# Altium PCB ArduinoUnoShield.PcbDoc
Units mil, origin at the board's own origin, x right, y up, seen from the top; angles counter-clockwise.
Board outline 2700 x 2100 mil, 2 copper layers (Top Layer, Bottom Layer); 38 components, 50 nets, 116 pads, 69 vias.
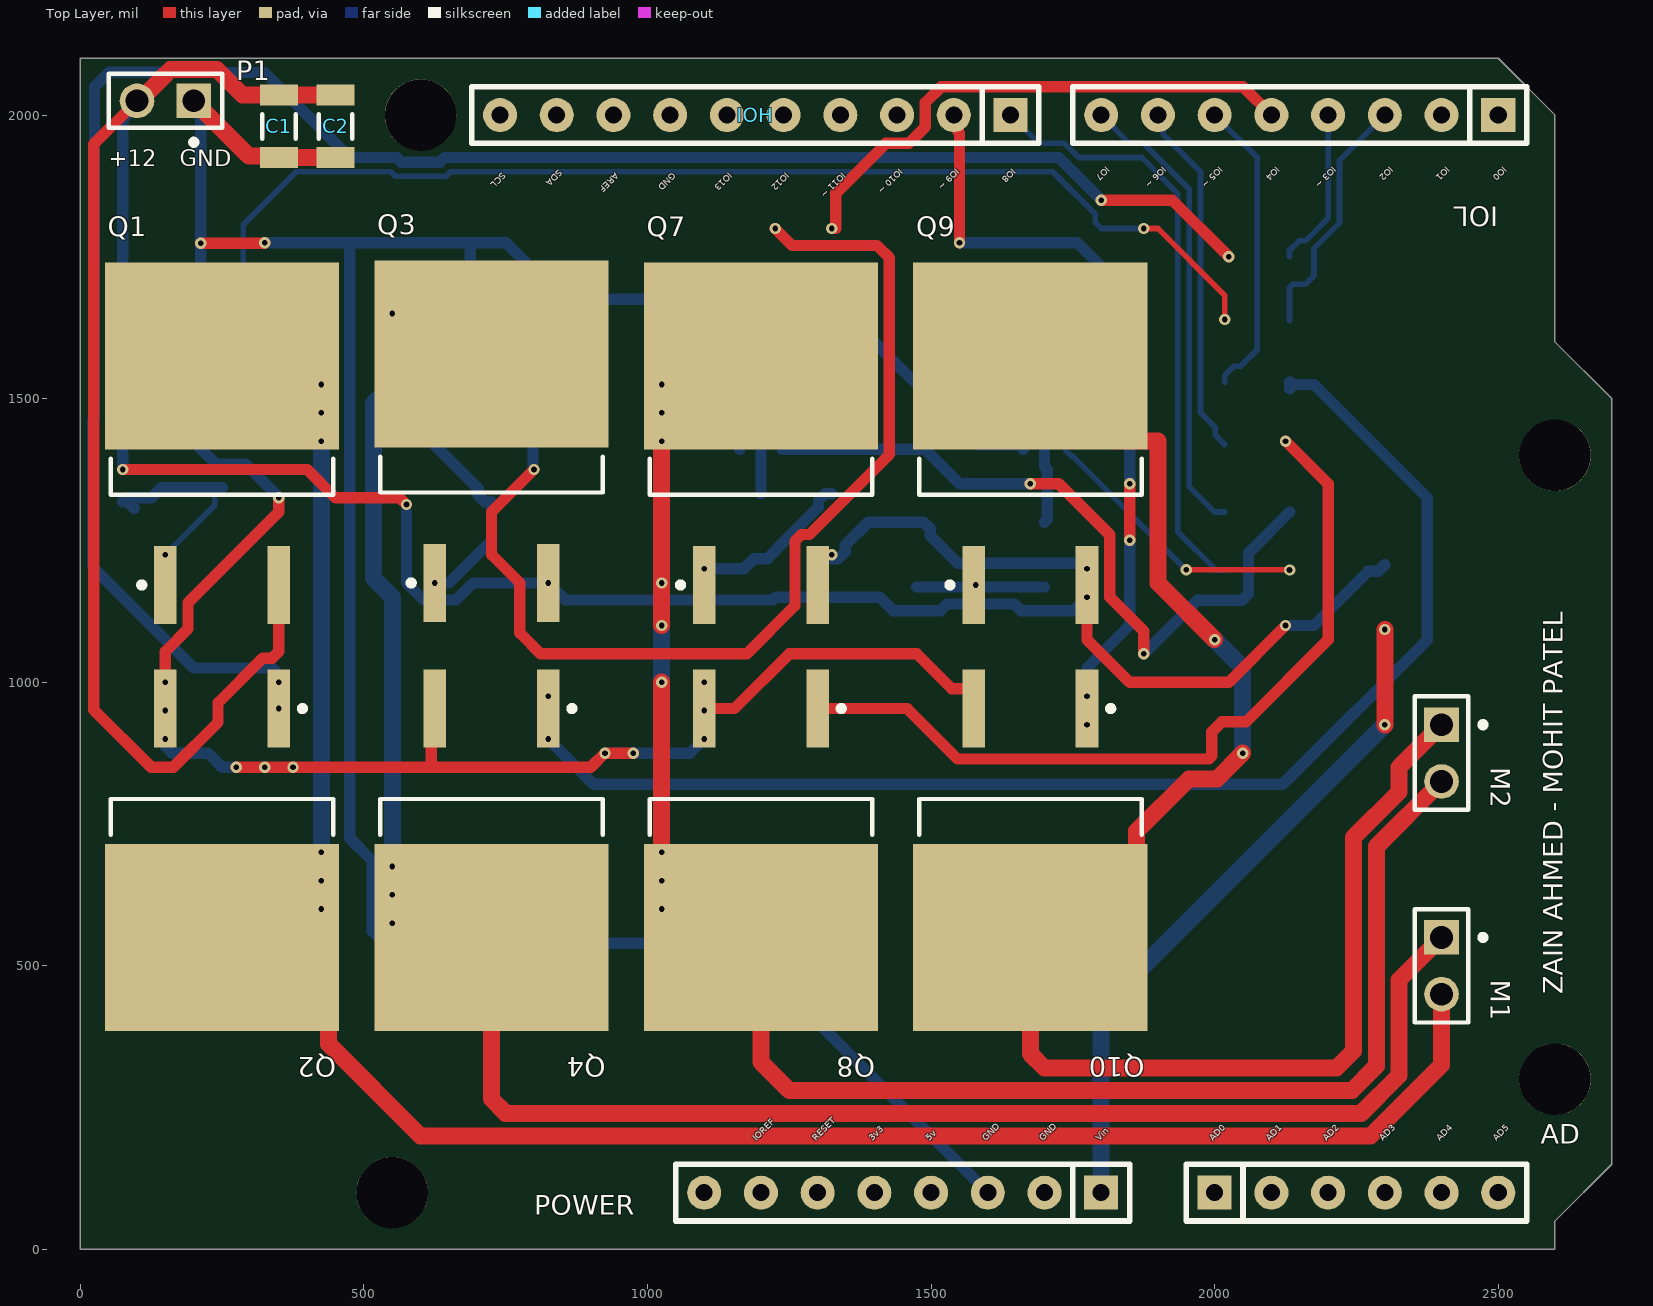
[diagram p0: Top Layer view]
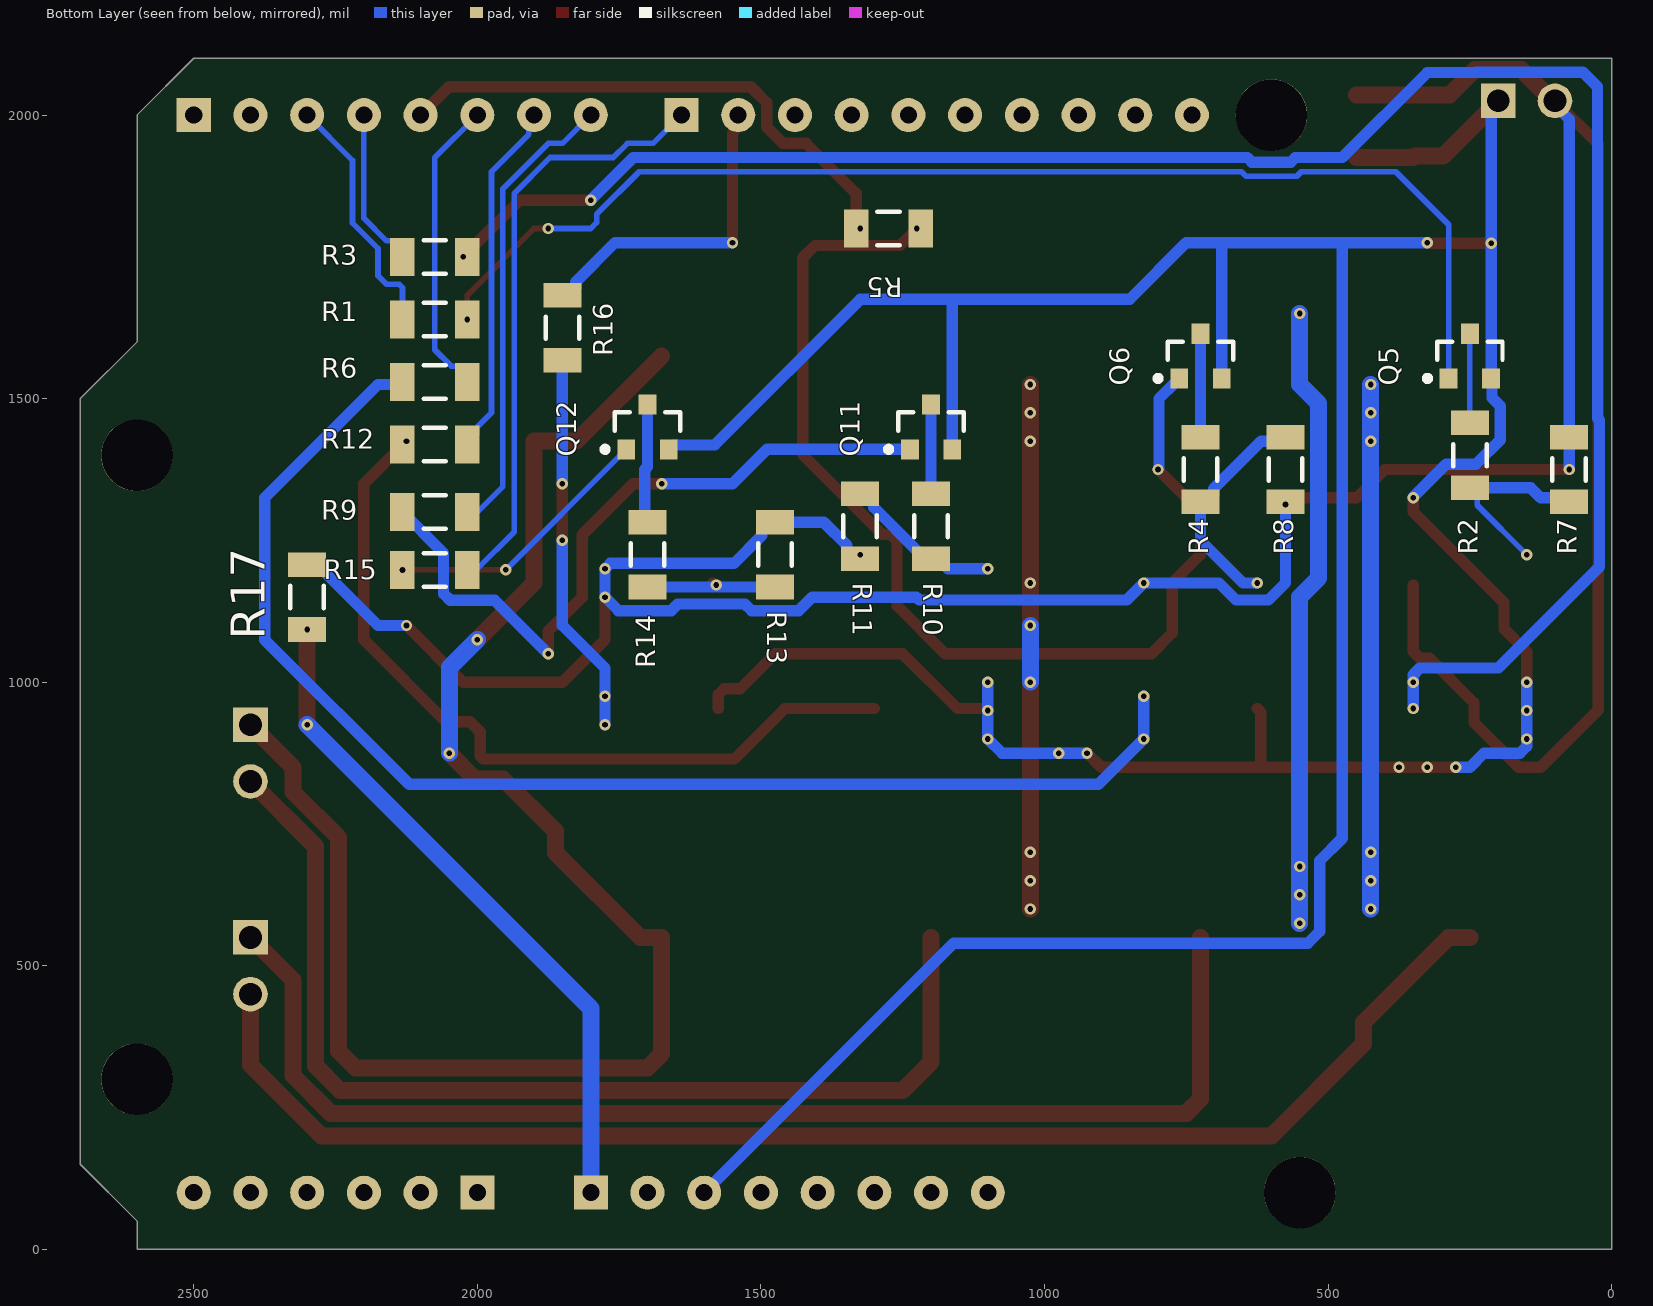
[diagram p1: Bottom Layer view, seen from below]

## Layer stack, top to bottom
Top Solder: solder mask 0.4, Solder Resist, Dk 3.5
Top Layer: signal copper 1.4
Dielectric1: dielectric 12.6, FR-4, Dk 4.8
Bottom Layer: signal copper 1.4
Bottom Solder: solder mask 0.4, Solder Resist, Dk 3.5

## Board outline
0,0 0,2100 2500,2100 2600,2000 2600,1600 2700,1500 2700,150 2600,50 2600,0

## Design rules (kind name [scope] priority, off if disabled: settings)
Clearance [All] p1: gap=10 ignorepadtopadclearanceinfootprint=FALSE except(0: Arc-Hole Track-Hole SMDPad-Hole THPad-Hole Via-Hole Fill-Hole Poly-Hole Region-Hole Text-Hole)
PolygonConnect [All] p1: connectstyle=Relief reliefconductorwidth=10 reliefentries=4 polygonreliefangle="90 Angle" airgapwidth=10
RoutingVias [All] p1: holewidth=10 width=50 viastyle="Through Hole" minholewidth=10 minwidth=20 maxholewidth=100 maxwidth=100
SilkToSolderMaskClearance SilkscreenOverComponentPads [IsPad] p1: minsilkscreentomaskgap=10 clearancetoexposedcopper=TRUE
SolderMaskExpansion [All] p1: expansion=4 istentingtop=FALSE
Width [All] p1: maxlimit=200 minlimit=10 preferedwidth=10 minimp=50.000000 maximp=50.000000 favimp=50.000000
29 further rules are at their usual default settings.

## Components (designator, comment, footprint, x,y, rotation, side; value= is the part's Value field where it differs from the comment)
AD "AD" "Header 6x1 8.5mm" 2000,100 r0 top locked
C1 "CAP 100nF 50V 1206(3216)" CAPC1206(3216)100_L 350,1980.12 r270 top value=100nF
C2 "CAP 100nF 50V 1206(3216)" CAPC1206(3216)100_L 450,1980.12 r270 top value=100nF
IOH "IOH" "Header 10x1 8.5mm" 1640,2000 r180 top locked
IOL "IOL" "Header 8x1 8.5mm" 2500,2000 r180 top locked
M1 "68000-102HLF" AMPH-68000-102HLF_V 2400,500 r270 top
M2 "68000-102HLF" AMPH-68000-102HLF_V 2400,875 r270 top
P1 "68000-102HLF" AMPH-68000-102HLF_V 150,2025 r180 top
POWER "POWER_UNO" "Header 8x1 8.5mm" 1800,100 r180 top locked
Q1 "IRF9630STRLPBF‎" ONSC-D2PAK-3-418B-04_V 250,1421.46 r90 top
Q2 "IRF630NSTRLPBF‎" ONSC-D2PAK-3-418B-04_V 250,703.54 r270 top
Q3 "IRF9630STRLPBF‎" ONSC-D2PAK-3-418B-04_V 725,1425 r90 top
Q4 "IRF630NSTRLPBF‎" ONSC-D2PAK-3-418B-04_V 725,703.54 r270 top
Q5 "BC817-16LT1G" ONSC-SOT-23-3-318-08_V 250,1575 r90 bottom
Q6 "BC817-16LT1G" ONSC-SOT-23-3-318-08_V 725,1575 r90 bottom
Q7 "IRF9630STRLPBF‎" ONSC-D2PAK-3-418B-04_V 1200,1421.46 r90 top
Q8 "IRF630NSTRLPBF‎" ONSC-D2PAK-3-418B-04_V 1200,703.54 r270 top
Q9 "IRF9630STRLPBF‎" ONSC-D2PAK-3-418B-04_V 1675,1421.46 r90 top
Q10 "IRF630NSTRLPBF‎" ONSC-D2PAK-3-418B-04_V 1675,703.54 r270 top
Q11 "BC817-16LT1G" ONSC-SOT-23-3-318-08_V 1200,1450 r90 bottom
Q12 "BC817-16LT1G" ONSC-SOT-23-3-318-08_V 1700,1450 r90 bottom
R1 "CRCW1206220KFKEA" RESC3216X60X45NL10T20 2075,1639.58 r180 bottom
R2 "CRCW1206220KFKEA" RESC3216X60X45NL10T20 250,1400 r270 bottom
R3 "CRCW1206220KFKEA" RESC3216X60X45NL10T20 2075,1750 r180 bottom
R4 "CRCW1206220KFKEA" RESC3216X60X45NL10T20 725,1375 r90 bottom
R5 "CRCW1206220KFKEA" RESC3216X60X45NL10T20 1275,1800 r0 bottom
R6 "CRCW1206220KFKEA" RESC3216X60X45NL10T20 2075,1529.17 r180 bottom
R7 "CRCW1206220KFKEA" RESC3216X60X45NL10T20 75,1375 r90 bottom
R8 "CRCW1206220KFKEA" RESC3216X60X45NL10T20 575,1375 r90 bottom
R9 "CRCW1206220KFKEA" RESC3216X60X45NL10T20 2075,1300 r0 bottom
R10 "CRCW1206220KFKEA" RESC3216X60X45NL10T20 1200,1275 r270 bottom
R11 "CRCW1206220KFKEA" RESC3216X60X45NL10T20 1325,1275 r270 bottom
R12 "CRCW1206220KFKEA" RESC3216X60X45NL10T20 2075,1418.75 r0 bottom
R13 "CRCW1206220KFKEA" RESC3216X60X45NL10T20 1475,1225 r270 bottom
R14 "CRCW1206220KFKEA" RESC3216X60X45NL10T20 1700,1225 r90 bottom
R15 "CRCW1206220KFKEA" RESC3216X60X45NL10T20 2075,1197.92 r180 bottom
R16 "CRCW1206220KFKEA" RESC3216X60X45NL10T20 1850,1625 r90 bottom
R17 "CRCW1206220KFKEA" RESC3216X60X45NL10T20 2300,1150 r270 bottom

## Footprints (in the part's own frame and the unit in brackets; to place one, negate y for a bottom-side part, rotate by r counter-clockwise, add the part's x,y. Pads: shape width x height; smd on the part's side, far side on the other; paste and mask are expansions set on the pad)
AMPH-68000-102HLF_V [mm] "THD, 2-Leads, Body 5.08x2.41mm, Pitch 2.54mm"
  rect 1.55x1.55 hole 1.02: 1(-1.27,0)
  round 1.55 hole 1.02: 2(1.27,0)
  silkscreen extent -2.54,-1.2 2.54,1.98, body extent -2.54,-1.2 2.54,1.2, height 8.38
CAPC1206(3216)100_L [mm] "Chip Capacitor, Body 3.2x1.6mm, Height 1mm, IPC High Density"
  rect 0.95x1.7 smd: 1(-1.4,0) 2(1.4,0)
  silkscreen extent -0.55,-0.75 0.55,0.75, body extent -1.7,-0.9 1.7,0.9, height 1
"Header 6x1 8.5mm" [mil] "Stackable 6 pin header"
  rect 60x60 hole 30: 1(0,0)
  round 60 hole 30: 2(100,0) 3(200,0) 4(300,0) 5(400,0) 6(500,0)
  silkscreen extent -50,-50 550,50, body extent -50,-50 550,50, height 335
"Header 8x1 8.5mm" [mil] "Stackable 8 pin header"
  rect 60x60 hole 30: 1(0,0)
  round 60 hole 30: 2(100,0) 3(200,0) 4(300,0) 5(400,0) 6(500,0) 7(600,0) 8(700,0)
  silkscreen extent -50,-50 750,50, body extent -50,-50 750,50, height 335
"Header 10x1 8.5mm" [mil] "Stackable 10 pin header"
  rect 60x60 hole 30: 1(0,0)
  round 60 hole 30: 2(100,0) 3(200,0) 4(300,0) 5(400,0) 6(500,0) 7(600,0) 8(700,0) 9(800,0) 10(900,0)
  silkscreen extent -50,-50 950,50, body extent -50,-50 950,50, height 335
ONSC-D2PAK-3-418B-04_V [mm] "DPAK, 3-Leads, Body 9.97x9.145mm, Pitch 2.54mm"
  rect 3.504x1.016 smd: 1(-6.35,2.54) 3(-6.35,-2.54)
  rect 8.38x10.49 smd: 4(3.9,0)
  silkscreen extent -6.47,-4.98 -0.69,4.98, body extent -2.3,-4.98 6.85,4.98, height 4.83
ONSC-SOT-23-3-318-08_V [mm] "SOT23, 3-Leads, Body 2.92x1.3mm, Pitch 0.95mm"
  rect 0.9x0.8 smd: 1(-1,0.95) 2(-1,-0.95) 3(1,0)
  silkscreen extent -1.12,-1.46 0.65,2.03, body extent -0.65,-1.46 0.65,1.46, height 1.11
RESC3216X60X45NL10T20 [mm] "Chip Resistor, 2-Leads, Body 3.20x1.60mm, IPC Medium Density"
  rect 1.1x1.7 smd: 1(-1.45,0) 2(1.45,0)
  silkscreen extent -0.5,-0.75 0.5,0.75, body extent -1.65,-0.85 1.65,0.85, height 0.6

## Part data
AD: Supplier Part Number 1=2699089, Supplier 1=Arrow, Supplier 2=Digi-Key, Supplier 3=Arrow, Supplier 4=Arrow, Supplier Part Number 2=SAM1198-06-ND, Supplier Part Number 3=2699088, Supplier Part Number 4=2699075
C1 C2: library part CMP-1037-04202-1, "CAP 100nF 50V ±10% 1206 (3216 Metric) Thickness 1mm SMD", Case-EIA=1206, Case-Metric=3216, Rated Voltage="50 V", Tolerance=Â±10%, Max Thickness="1 mm", Technology=SMT
IOH: Supplier Part Number 1=2698803S4475693N1004, Supplier 1=Arrow, Supplier 2=Digi-Key, Supplier 3=Arrow, Supplier Part Number 2=SAM1198-10-ND, Supplier Part Number 3=2698789
IOL POWER: Supplier Part Number 1=SAM1198-08-ND, Supplier 1=Digi-Key, Supplier 2=Arrow, Supplier 3=Arrow, Supplier 4=Arrow, Supplier Part Number 2=2698939, Supplier Part Number 3=2698940, Supplier Part Number 4=2698925
M1 M2 P1: library part CMP-2000-05666-1, "Male Header, Pitch 2.54 mm, 1 x 2 Position, Height 8.38 mm, Tail Length 2.41 mm, RoHS, Bulk", Current Rating=3A, Flammability Rating=UL94V-0, Insulation Resistance=5000MOhms, Manufacturer=FCI, Operating Temperature Range=-65Cto+125C, Package Description="Male Header, Pitch 2.54 mm, 1 x 2 Position, Height 8.38 mm, Tail Length 2.41 mm", Voltage Rating=1.5kV, Brand=FCI, Contact Gender=Pin(Male), Contact Material=PhosphorBronze, Contact Plating=Gold/GTX, Datasheet URL=https://datasheet.ciiva.com/5149/68000-274228-5149165.pdf, Datasheet Version="Rev. F, 04/2006", Factory Pack Quantity=100, Housing Material=Thermoplastic, Manufacturer URL=http://www.amphenol.com/, Mating Post Length=5.84mm, Mounting Angle=Vertical, Mounting Style=ThroughHole, Mounting Technology=ThroughHole, Number of Positions=2, Number of Positions / Contacts=2, Number of Rows=1, Package Reference=68000-102HLF, Packaging=Bulk, Pitch=2.54mm, Product Category=Headers&WireHousings, Product Type=Headers, RoHS=Details, Series=68000, Termination Post Length=2.41mm, Termination Style=ThroughHole, Type=Unshrouded
Q1 Q3 Q7 Q9: library part CMP-1058-00099-1, "Power MOSFET, 50 A, 30 V, Logic Level, P-Channel, 3-Pin D2PAK, Pb-Free, Tape and Reel", Manufacturer="On Semiconductor", Package Type=D2PAK-3, PartNumber=MTB50P03HDLT4G, Channel Polarity="P Channel", Ciss Typ (pF)=3500, ComponentLink1Description="Manufacturer URL", ComponentLink1URL=http://www.onsemi.com/, ComponentLink2Description=Datasheet, ComponentLink2URL=http://www.onsemi.cn/pub_link/Collateral/MTB50P03HDL-D.PDF, ComponentLink3Description="Package Specification", ComponentLink3URL=http://www.onsemi.com/pub_link/Collateral/418B-04.PDF, Configuration=Single, Coss Typ (pF)=1550, Crss Typ (pF)=550, DatasheetVersion="Rev. 6", Mounting Technology="Surface Mount", PackageDescription="3-Pin Flange Mount, Body 9.145 x 9.97 mm, Pitch 2.54 mm", PackageReference=D2PAK-3-418B-04, PackageVersion="Rev. K, 09/2008", Packing="Tape and Reel", Qrr Typ (nC)=246, RoHS=Pb-Free, V(BR)DSS Min (V)=30, VGS(th) Max (V)=2, VGS Max (V)=15
Q2 Q4 Q8 Q10: library part CMP-1058-00123-1, "Power MOSFET, 60 V, 60 A, N-Channel, 3-Pin D2PAK, Pb-Free, Tape and Reel", Manufacturer="On Semiconductor", Package Type=D2PAK-3, PartNumber=NTB60N06T4G, Channel Polarity="N Channel", Ciss Typ (pF)=2300, ComponentLink1Description="Manufacturer URL", ComponentLink1URL=http://www.onsemi.com/, ComponentLink2Description=Datasheet, ComponentLink2URL=http://www.onsemi.cn/pub_link/Collateral/NTB60N06-D.PDF, ComponentLink3Description="Package Specification", ComponentLink3URL=http://www.onsemi.com/pub_link/Collateral/418B-04.PDF, Configuration=Single, Coss Typ (pF)=660, Crss Typ (pF)=144, DatasheetVersion="Rev. 0", Mounting Technology="Surface Mount", PackageDescription="3-Pin Flange Mount, Body 9.145 x 9.97 mm, Pitch 2.54 mm", PackageReference=D2PAK-3-418B-04, PackageVersion="Rev. K, 09/2008", Packing="Tape and Reel", Qrr Typ (nC)=146, RoHS=Pb-Free, V(BR)DSS Min (V)=60, VGS(th) Max (V)=4
Q5 Q6 Q11 Q12: library part CMP-1048-00736-1, "General Purpose Transistor, NPN Silicon, 3-Pin SOT-23, Pb-Free, Tape and Reel", Manufacturer="On Semiconductor", ComponentLink1Description="Manufacturer URL", ComponentLink1URL=http://www.onsemi.com/, ComponentLink2Description=Datasheet, ComponentLink2URL=http://www.onsemi.com/pub_link/Collateral/BC817-16LT1-D.PDF, ComponentLink3Description="Package Specification", ComponentLink3URL=http://www.onsemi.cn/pub_link/Collateral/318-08.PDF, DatasheetVersion="Rev. 12", fT Min (MHz)=100, IC Continuous (A)=0.5, Mounting Technology="Surface Mount", PackageDescription="3-Pin Small Outline Transistor, Body 2.92 x 1.3 mm, Pitch 0.95 mm", PackageReference=SOT-23-3-318-08, PackageVersion="Rev. AP, 11/2009", Packing="Tape and Reel", PartNumber=BC817-16LT1G, Polarity=NPN, RoHS=TRUE
R1 R2 R3 R4 R5 R6 R7 R8 R9 R10 R11 R12 R13 R14 R15 R16 R17: library part CMP-2003-01954-1, Manufacturer="Vishay Dale", Part Number=CRCW1206220KFKEA

## Free pads (board coordinates)
  round 125.98 hole 125.98: 0(550,100) 0(600,2000) 0(2600,300) 0(2600,1400)

## Via types
v1: diameter 20, hole 10, Top Layer to Bottom Layer, 69 vias

## Nets (pads, with @x,y where several pads share a name; then routed paths per layer and width w, separated by ;. In a path a pad name is that pad's centre, name@x,y a point inside that pad or via, vN(x,y) a via of type N, cw(c..) or ccw(c..) an arc to the next point about the centre after c; other vN are vias at no path point)
3V3: POWER.5
5V: POWER.4
+12: C1.1 C2.1 P1.2 Q1.3 Q3.3 Q7.3 Q9.3 R7.2 R8.1 R11.2 R13.1 R17.1 | length 5960.5
  Top Layer w20: v1(75,1375) 400,1375 450,1325 563.28,1325 v1(575,1313.28) ; P1.2 23.5,1948.5 23.5,951.5 125,850 163.72,850 242.72,929 242.72,963.52 321.72,1042.52 338.28,1042.52 350,1054.24 Q1.3 ; v1(1775,1150) 1775,1075 1850,1000 2025,1000 v1(2125,1100)
  Top Layer w30: P1.2@102.11,2022.89 144.49,2065.27 144.49,2065.87 159.13,2080.51 240.87,2080.51 286.14,2035.24 C1.1 C2.1
  Top Layer w50: P1.2 P1.2@102.11,2022.89
  Bottom Layer w20: v1(75,1375) R7.2 75,1992.77 100,2017.77 P1.2 ; R8.1@575,1300 575,1175 605,1145 662.43,1145 692.43,1175 v1(825,1175) 855,1145 1220.97,1145 1225.97,1150 1409.51,1150 1433.25,1126.26 1516.75,1126.26 1528.4,1137.91 1646.6,1137.91 1658.25,1126.26 1751.26,1126.26 v1(1775,1150) v1(1775,1200) 1765.43,1209.57 1547.52,1209.57 1498.46,1258.62 1498.46,1270.43 1486.81,1282.09 R13.1 1389.17,1282.09 1348.46,1241.38 1348.46,1229.57 1336.81,1217.91 R11.2 ; v1(2125,1100) 2175,1100 2270.43,1195.43 2288.35,1195.43 R17.1
  other v1: 1325,1225
AD0: AD.1
AD1: AD.2
AD2: AD.3
AD3: AD.4
AD4: AD.5
AD5: AD.6
AREF: IOH.8
GND: C1.2 C2.2 P1.1 POWER.3 Q2.3 Q4.3 Q5.2 Q6.2 Q8.3 Q10.3 Q11.2 Q12.2 | length 8031
  Top Layer w20: v1(150,1000) 150,1054.2 190,1094.2 190,1140 350,1300 v1(350,1325) ; v1(212.6,1774.02) 324.02,1774.02 v1(325,1775) ; v1(275,850) v1(325,850) v1(375,850) 618.57,850 ; Q4.3 618.57,947.11 618.57,850 ; v1(975,875) v1(925,875) 900,850 618.57,850 ; Q8.3 1153.54,953.54 1250,1050 1475,1050 1536.72,988.28 1565,988.28 1575,978.28 Q10.3
  Top Layer w30: P1.1 297.1,1927.9 347.1,1927.9 C1.2 C2.2
  Bottom Layer w10: P1.1 P1.1@212.6,2012.4
  Bottom Layer w20: v1(150,1000) v1(150,950) v1(150,900) 150,886.72 161.72,875 225,875 250,850 v1(275,850) ; P1.1@212.6,2012.4 v1(212.6,1774.02) Q5.2 210.92,1533.96 210.92,1501.41 196.54,1487.02 196.54,1427.15 239.12,1384.57 291.75,1384.57 350,1326.32 v1(350,1325) ; v1(325,1775) 475,1775 ; Q6.2 687.6,1762.6 ; v1(925,875) v1(975,875) 1075,875 v1(1100,900) v1(1100,950) v1(1100,1000) ; Q11.2 1162.6,1675 ; POWER.3 1160,540 535.5,540 515,560.5 515,685 475,725 475,1775 ; Q12.2 1662.6,1412.6 1656.85,1418.35 1581.65,1418.35 1325,1675 1162.6,1675 ; 475,1775 750,1775 850,1675 1162.6,1675
IO0: IOL.1
IO1: IOL.2
IO2: IOL.3 R1.1 | length 444.9
  Bottom Layer w10: R1.1@2132.09,1637.5 R1.1 2132.09,1695.68 2137.94,1701.54 2159.95,1701.54 2175,1716.58 2175,1764.63 2220,1809.63 2220,1920 IOL.3
IO3: IOL.4 R3.1 | length 284.9
  Bottom Layer w10: R3.1 2132.09,1761.51 2148.74,1778.17 2160.25,1778.17 2200,1817.91 IOL.4
IO4: IOL.5 R5.2 | length 953.5
  Top Layer w20: v1@1332.09,1800 1332.09,1861.81 1420.28,1950 1460.71,1950 1490,1979.29 1490,2022.14 1517.86,2050 2050,2050 IOL.5
  other v1: 1325,1800
IO5: IOL.6 R6.2 | length 532.3
  Bottom Layer w10: IOL.6 2075,1925 2075,1586.25 2046.08,1557.33 2034.57,1557.33 2017.91,1540.68 R6.2
IO6: IOL.7 R12.1 | length 630.1
  Bottom Layer w10: IOL.7 1909.32,1990.68 1909.32,1965.68 1975,1900 1975,1475 2001.26,1448.74 2001.26,1435.4 R12.1
IO7: IOL.8 R9.1 | length 815.4
  Bottom Layer w10: IOL.8 1850,1950 1875,1950 1955,1870 1955,1345 1999.81,1300.19 2017.72,1300.19 R9.1
IO8: IOH.1 R15.2 | length 1059.7
  Bottom Layer w10: IOH.1 1690,1950 1735.36,1950 1760.36,1925 1871.72,1925 1935,1861.72 1935,1265 2002.08,1197.92 R15.2
IO9: IOH.2 R16.2 | length 574.5
  Top Layer w20: IOH.2 1547.65,1992.35 1547.65,1970.63 1550,1968.28 v1(1550,1775)
  Bottom Layer w20: v1(1550,1775) 1757.09,1775 1826.54,1705.55 1826.54,1693.74 1838.19,1682.09 R16.2
IO10: IOH.3
IO11: IOH.4
IO12: IOH.5
IO13: IOH.6
IOREF: POWER.7
NetM1_1: M1.1 Q3.4 Q4.4 | length 3300.1
  Top Layer w30: Q4.4 725,265 750,240 2258.43,240 2325,306.57 2325,475 M1.1
  Bottom Layer w30: v1(550,575) v1(550,625) v1(550,675) 550,1150.5 516.54,1183.97 516.54,1491.54 550,1525 v1(550,1650)
NetM1_2: M1.2 Q1.4 Q2.4 | length 3418.8
  Top Layer w30: Q2.4 287.59,550 437.55,400.04 437.55,362.45 600,200 2275,200 2400,325 M1.2
  Bottom Layer w30: v1(425,600) v1(425,1425) v1(425,1475) v1(425,1525)
  other v1: 425,650 425,700
NetM2_1: M2.1 Q9.4 Q10.4 | length 2867.2
  Top Layer w30: Q9.4 1824.96,1425.04 1899.96,1425.04 1900,1425 1900,1175 v1(2000,1075) ; v1(2049.5,875) 2004.06,829.57 1954.57,829.57 1862.55,737.55 1862.55,699.96 1712.59,550 Q10.4 1675,345 1700,320 2215,320 2245,350 2245,726.57 2325,806.57 2325,850 M2.1
  Bottom Layer w30: v1(2000,1075) 2049.5,1025.5 v1(2049.5,875)
NetM2_2: M2.2 Q7.4 Q8.4 | length 2818.1
  Top Layer w30: v1(1025,600) v1(1025,650) v1(1025,700) v1(1025,1000) ; v1(1025,1100) v1(1025,1175) v1(1025,1425) v1(1025,1475) v1(1025,1525) ; Q8.4 1200,330 1250,280 2241.86,280 2285,323.14 2285,710 M2.2
  Bottom Layer w30: v1(1025,1000) v1(1025,1100)
NetQ1_1: Q1.1 R2.2 R7.1 | length 369.3
  Bottom Layer w10: v1(150,1225) 237.12,1312.12 237.12,1330.03 R2.2
  Bottom Layer w20: R7.1@94.82,1306.26 83.16,1317.91 R7.1 82.32,1325.23 125.23,1325.23 142.91,1342.91 R2.2
NetQ2_1: Q2.1 R3.2 | length 3467
  Top Layer w20: v1(1800,1850) 1925,1850 v1(2025,1750)
  Bottom Layer w20: v1(350,953.54) v1(350,1000) 350,1013.28 338.28,1025 200,1025 21.54,1203.46 21.54,1462.02 25,1465.49 25,2050 50.51,2075.51 238.8,2075.51 239.31,2075 325,2075 475,1925 557.63,1925 565.62,1917.01 634.38,1917.01 642.37,1925 1725,1925 v1(1800,1850)
NetQ3_1: Q3.1 R4.1 R8.2 | length 389.4
  Bottom Layer w20: R8.2@585.83,1425 617.91,1425 701.54,1341.38 701.54,1329.57 713.19,1317.91 R4.1 725,1250 650,1175 v1(625,1175)
NetQ4_1: Q4.1 R6.1 | length 2354.5
  Bottom Layer w20: v1(825,975) v1(825,900) 905,820 2120,820 2375,1075 2375,1325 2175,1525 2139.73,1525 2132.09,1517.36 R6.1
NetQ5_1: Q5.1 R1.2 | length 2188.1
  Top Layer w10: v1(1875,1800) 1900,1800 2017.91,1682.09 v1(2017.91,1639.58)
  Bottom Layer w10: Q5.1 287.4,1806.54 380.86,1900 547.28,1900 555.27,1892.01 644.73,1892.01 652.72,1900 1714.64,1900 1789.64,1825 1789.64,1810.36 1800,1800 v1(1875,1800)
NetQ5_3: Q5.3 R2.1 | length 157.3
  Bottom Layer w10: R2.1 Q5.3
NetQ6_1: Q6.1 R5.1 | length 1966
  Top Layer w20: v1(800,1375) 725,1300 725,1225 775,1175 775,1086.72 811.72,1050 1175,1050 1260,1135 1260,1248.72 1271.72,1260.43 1285.43,1260.43 1426.5,1401.5 1426.5,1748.24 1404.74,1770 1255,1770 v1(1225,1800)
  Bottom Layer w20: Q6.1 762.4,1533.66 768.15,1527.91 770.12,1527.91 798.03,1500 798.03,1376.97 v1(800,1375)
NetQ6_3: Q6.3 R4.2 | length 182.3
  Bottom Layer w20: R4.2 Q6.3
NetQ7_1: Q7.1 R10.2 R11.1 | length 287.2
  Bottom Layer w20: v1(1100,1200) 1170.28,1200 1188.19,1217.91 R10.2 1211.81,1217.91 1223.46,1229.57 1223.46,1230.55 1301.54,1308.62 1301.54,1320.43 1313.19,1332.09 R11.1
NetQ8_1: Q8.1 R12.2 | length 1429.9
  Top Layer w20: Q8.1 1457.74,953.54 1546.72,864.57 1989.57,864.57 1995,870 1995,912.43 2012.57,930 2055,930 2200,1075 2200,1350 v1(2125,1425)
NetQ9_1: Q9.1 R13.2 R14.1 | length 234.4
  Top Layer w20: Q9.1 v1(1578.54,1171.46) 1581.46,1171.46 Q9.1@1585,1175
  Bottom Layer w20: R13.2 1575,1167.91 v1(1578.54,1171.46) ; v1@1582.09,1167.91 R14.1
NetQ10_1: Q10.1 R16.1 | length 674
  Top Layer w20: v1(1850,1250) v1(1850,1350)
  Bottom Layer w20: v1(1775,925) v1(1775,975) 1775,1025 1850,1100 v1(1850,1250) ; v1(1850,1350) R16.1
NetQ11_1: Q11.1 R9.2 | length 1277.3
  Top Layer w20: v1(1675,1350) 1725,1350 1815,1260 1815,1150 1875,1090 v1(1875,1050)
  Bottom Layer w20: Q11.1 1489.37,1410.63 1550,1350 v1(1675,1350) ; v1(1875,1050) 1969.45,1144.45 2047.85,1144.45 2059.57,1156.17 2059.57,1227.48 R9.2
NetQ11_3: Q11.3 R10.1 | length 157.3
  Bottom Layer w20: R10.1 Q11.3
NetQ12_1: Q12.1 R15.1 | length 483.9
  Top Layer w10: v1(1950,1198.03) 2131.97,1198.03 v1(2132.09,1197.92)
  Bottom Layer w10: Q12.1 1737.4,1408.66 1748.15,1397.91 1750.12,1397.91 v1(1950,1198.03)
NetQ12_3: Q12.3 R14.2 | length 211.4
  Bottom Layer w20: R14.2 1705,1287.09 1705,1375 1700,1380 Q12.3
RESET: POWER.6
SCL: IOH.10
SDA: IOH.9
VIN: POWER.1 R17.2 | length 1200
  Top Layer w30: v1(2300,925) v1(2300,1092.91)
  Bottom Layer w30: POWER.1 1800,425 v1(2300,925)
pads on no net: IOH.7 POWER.2 POWER.8

## Silkscreen, mask and mechanical layers (free items; w line width, h text height)
Top Overlay:
  text "IO7" at 1805,1912.93 h20 r225
  text "IO6 ~" at 1905,1912.93 h20 r225
  text "IO5 ~" at 2005,1912.93 h20 r225
  text "IO4" at 2105,1912.93 h20 r225
  text "IO3 ~" at 2205,1912.93 h20 r225
  text "IO2" at 2305,1912.93 h20 r225
  text "IO1" at 2405,1912.93 h20 r225
  text "IO0" at 2505,1912.93 h20 r225
  text "IO10 ~" at 1440,1910 h20 r225
  text "IO9 ~" at 1540,1910 h20 r225
  text "IO8" at 1640,1910 h20 r225
  text "SDA" at 840,1907.93 h20 r225
  text "SCL" at 740,1902.93 h20 r225
  text "AREF" at 940,1902.93 h20 r225
  text "GND" at 1040,1902.93 h20 r225
  text "IO13" at 1140,1902.93 h20 r225
  text "IO12" at 1240,1902.93 h20 r225
  text "IO11 ~" at 1340,1902.93 h20 r225
  text "+12" at 50,1900 h50
  text "GND" at 175,1900 h50
  text "ZAIN AHMED - MOHIT PATEL" at 2625,450 h60 r90
  text "IOREF" at 1195,187.07 h20 r45
  text "RESET" at 1300,187.07 h20 r45
  text "3v3" at 1400,187.07 h20 r45
  text "5v" at 1500,187.07 h20 r45
  text "GND" at 1600,187.07 h20 r45
  text "GND" at 1700,187.07 h20 r45
  text "Vin" at 1800,187.07 h20 r45
  text "AD0" at 2000,187.07 h20 r45
  text "AD1" at 2100,187.07 h20 r45
  text "AD2" at 2200,187.07 h20 r45
  text "AD3" at 2300,187.07 h20 r45
  text "AD4" at 2400,187.07 h20 r45
  text "AD5" at 2500,187.07 h20 r45
  text "RESET" at 1295,-2515 h20 r45
  text "3v3" at 1395,-2515 h20 r45
  text "5v" at 1495,-2515 h20 r45
  text "GND" at 1595,-2515 h20 r45
  text "GND" at 1695,-2515 h20 r45
  text "Vin" at 1795,-2515 h20 r45
Mechanical 1:
  circle w5: c600,2000 r62.99
  circle w5: c2600,300 r62.99
  circle w5: c550,100 r62.99
  circle w5: c2600,1400 r62.99
  lines w5: 0,0 0,2100 2500,2100 2600,2000 2600,1600 2700,1500 2700,150 2600,50 2600,0 0,0